# Altium PCB MultiRotor_v0.3.PcbDoc
Units mil, origin at the board's own origin, x right, y up, seen from the top; angles counter-clockwise.
Board outline 1840 x 1456 mil, 2 copper layers (Top Layer, Bottom Layer); 44 components, 42 nets, 161 pads, 24 vias.
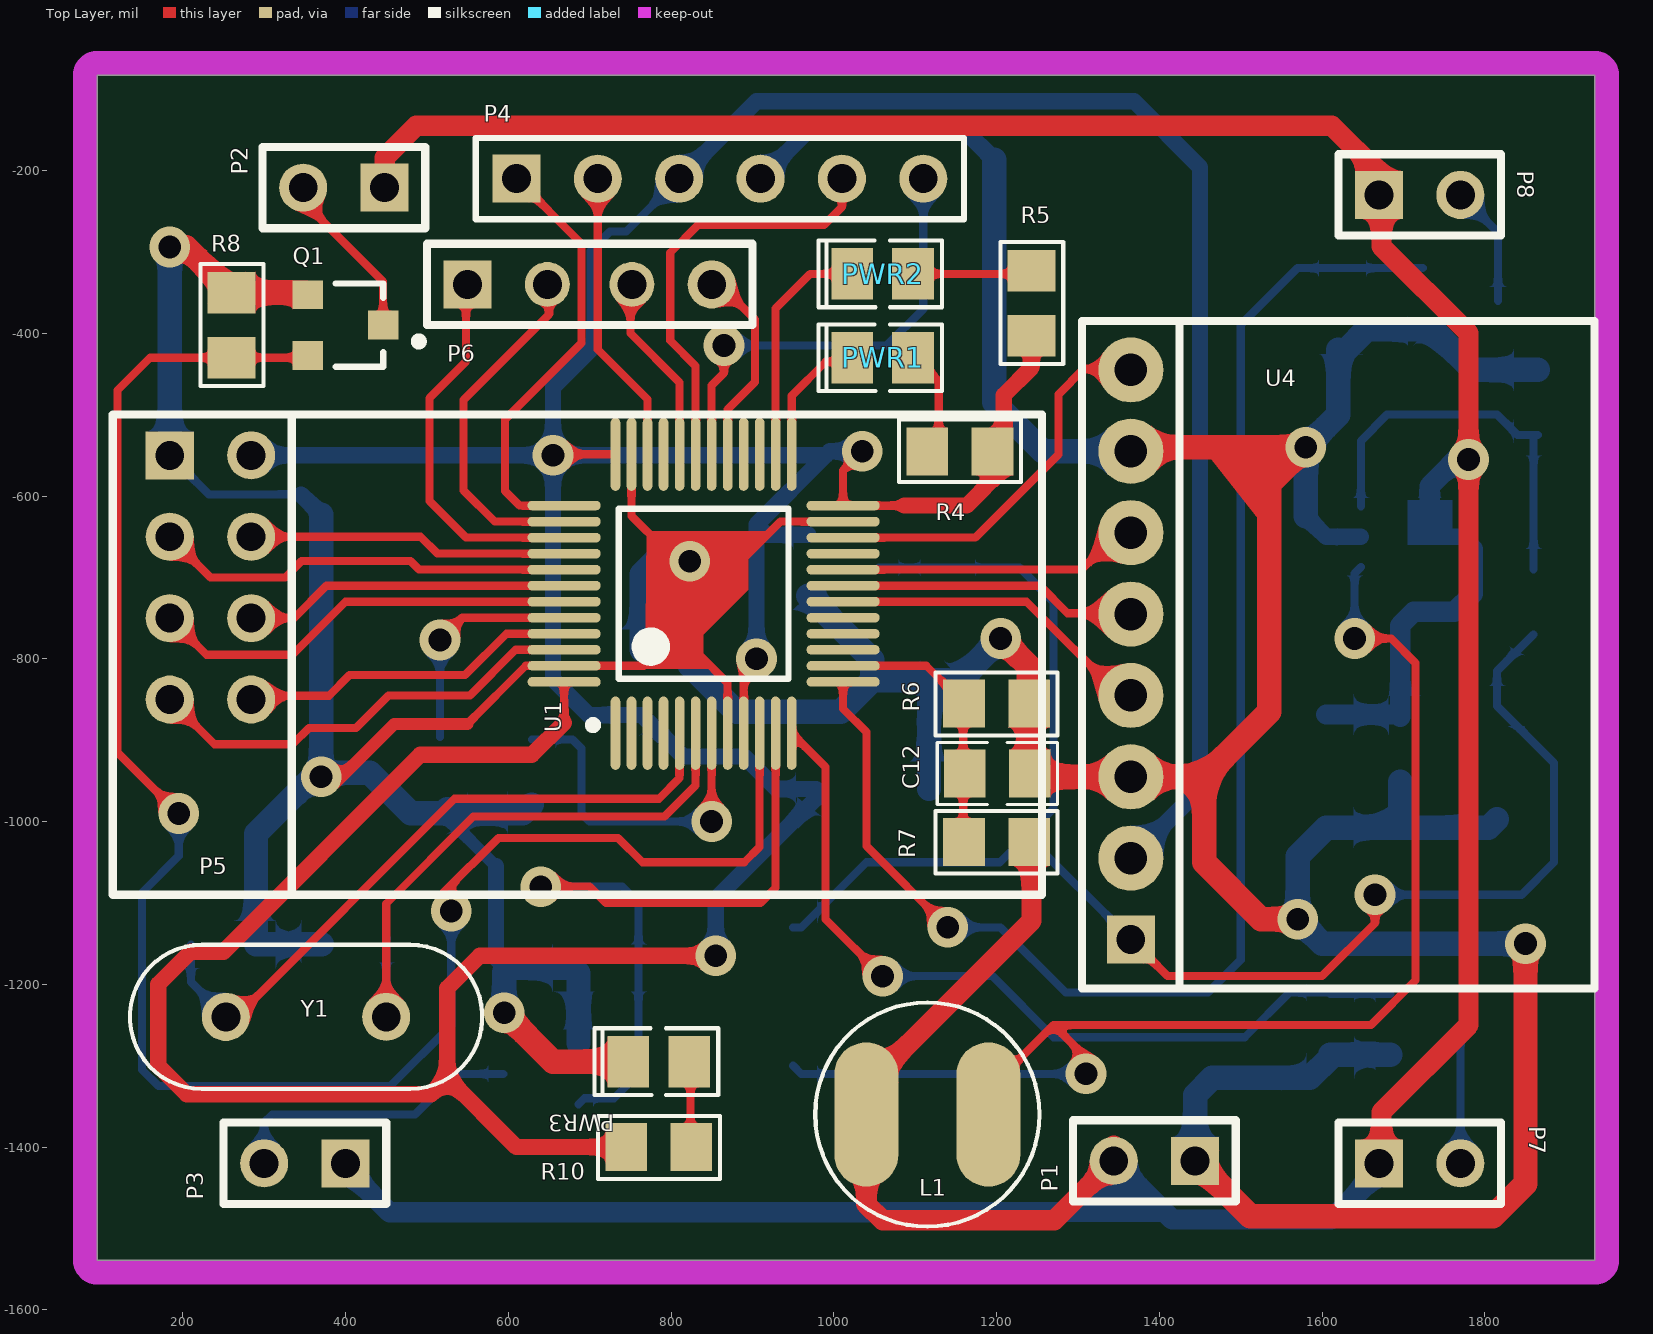
[diagram p0: Top Layer view]
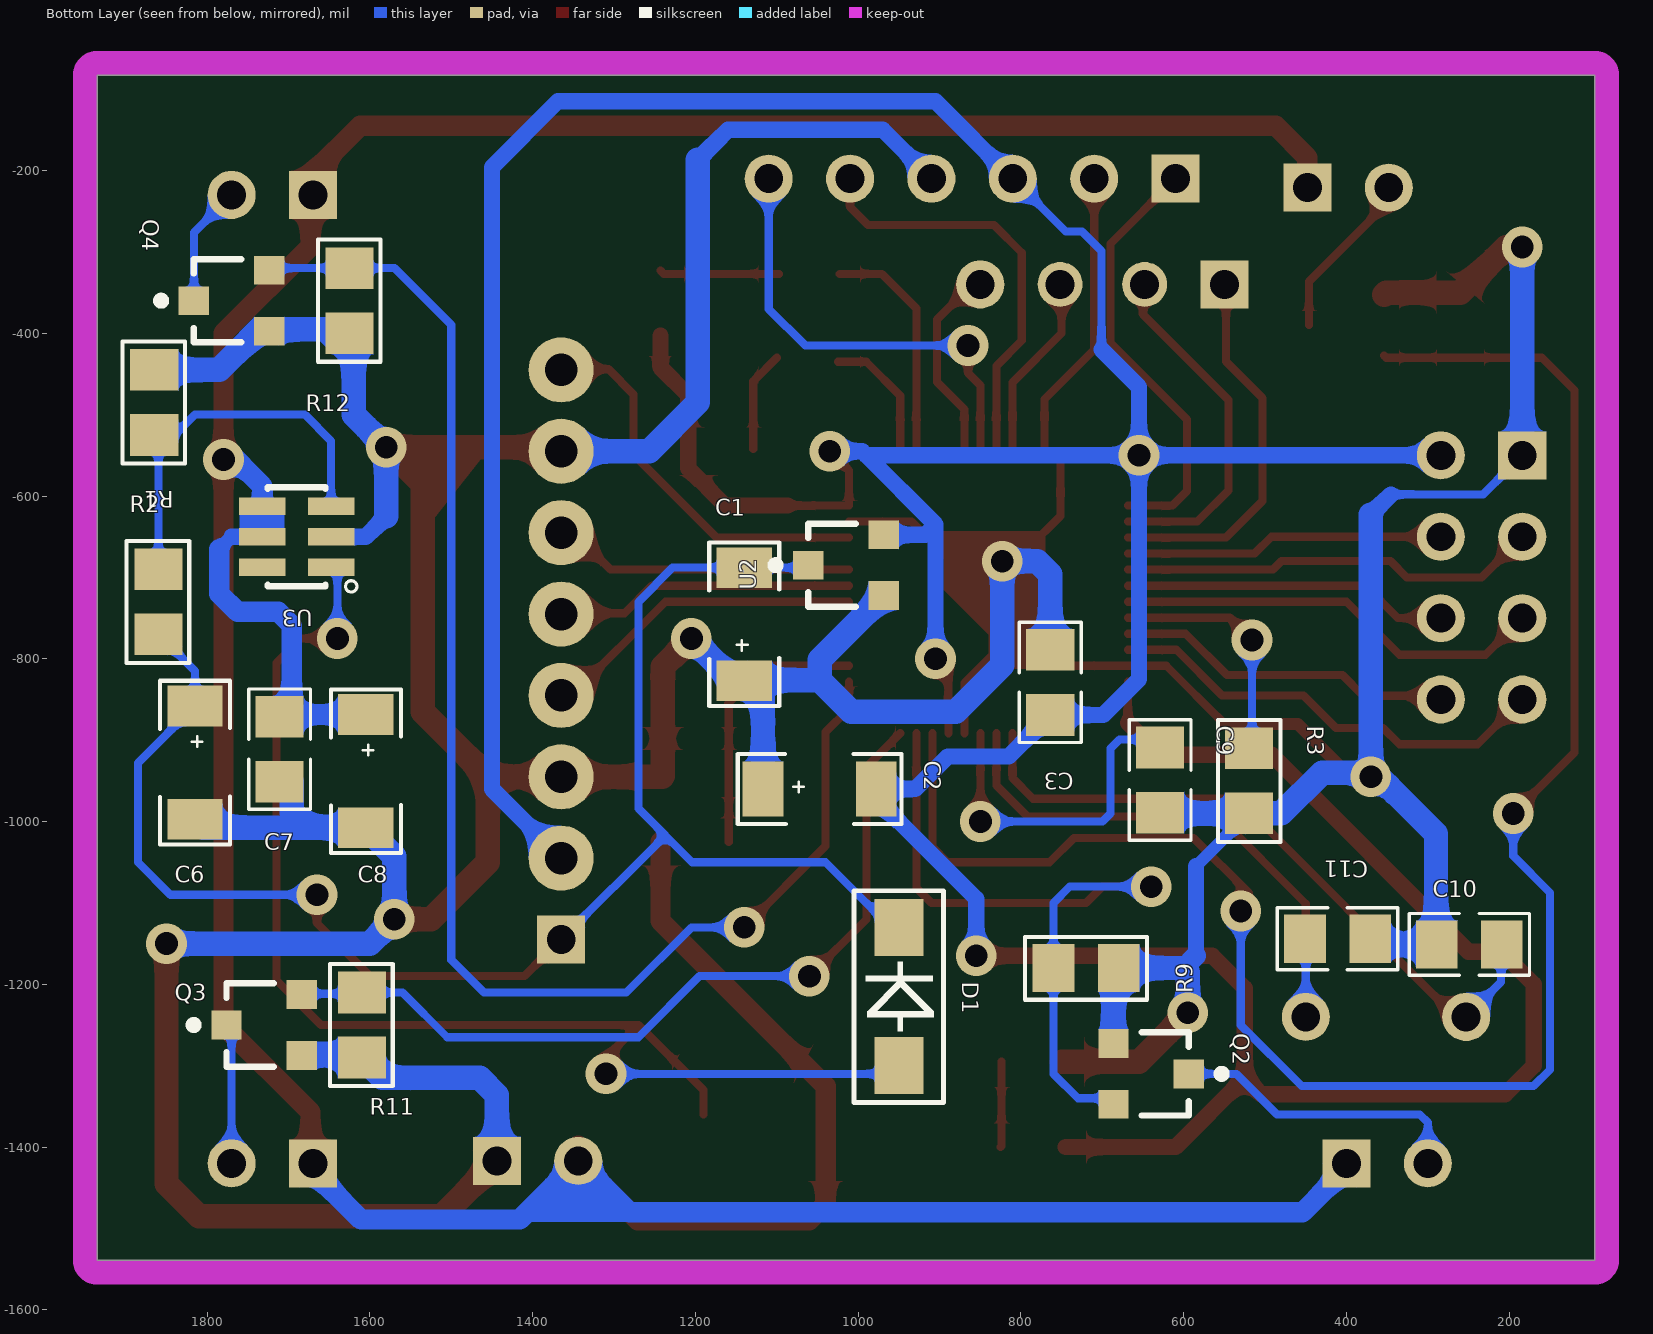
[diagram p1: Bottom Layer view, seen from below]

## Layer stack, top to bottom
Top Solder: solder mask 0.4, Solder Resist, Dk 3.5
Top Layer: signal copper 1.4
Dielectric1: dielectric 12.6, FR-4, Dk 4.8
Bottom Layer: signal copper 1.4
Bottom Solder: solder mask 0.4, Solder Resist, Dk 3.5

## Board outline
95,-83 1935,-83 1935,-1539 95,-1539

## Design rules (kind name [scope] priority, off if disabled: settings)
Clearance polygon [InPolygon] p1: gap=17
Clearance [All] p2: gap=7
PlaneClearance [All] p1: clearance=30
PolygonConnect [All] p1: connectstyle=Relief reliefconductorwidth=10 reliefentries=4 polygonreliefangle="90 Angle" airgapwidth=10
RoutingVias [All] p1: holewidth=28 width=50 viastyle="Through Hole" minholewidth=28 minwidth=50 maxholewidth=28 maxwidth=50
SilkToSolderMaskClearance SilkscreenOverComponentPads [IsPad] p1: minsilkscreentomaskgap=10 clearancetoexposedcopper=TRUE
SolderMaskExpansion [All] p1: expansion=4
Width [All] p1: maxlimit=40 minlimit=10 preferedwidth=10
28 further rules are at their usual default settings.

## Components (designator, comment, footprint, x,y, rotation, side; value= is the part's Value field where it differs from the comment)
C1 "Cap Pol1" CAP[1206] 1140,-760 r90 bottom
C2 "Cap Pol1" CAP[1206] 1050,-960 r180 bottom
C3 "Cap" CAP[0805] 765,-830 r270 bottom
C6 "Cap" CAP[1206] 1815,-925 r270 bottom
C7 "Cap" CAP[0805] 1710,-910 r90 bottom
C8 "Cap" CAP[1206] 1605,-935.5 r270 bottom
C9 "Cap" CAP[0805] 630,-950 r270 bottom
C10 "Cap" CAP[0805] 250,-1150 r0 bottom
C11 "Cap" CAP[0805] 410,-1145 r180 bottom
C12 "Cap" CAP[0805] 1200,-940 r180 top
D1 "1n5819" "DO-214AC - Diode" 950,-1300 r90 bottom
L1 "Inductor" Inductor_T10uH 1115,-1360 r0 top
P1 "Header 2" H2.54-1X2 1394,-1417 r180 top
P2 "Header 2" H2.54-1X2 398,-221 r180 top
P3 "Header 2" H2.54-1X2 350,-1420 r180 top
P4 "SIP+串口" HDR1X6 610,-210 r0 top
P5 "NRF2401" NRF(2401)模块 184,-550 r90 top
P6 "遥控接收PWM信号" H2.54-1X4 700,-340 r0 top
P7 "Header 2" H2.54-1X2 1720,-1420 r0 top
P8 "Header 2" H2.54-1X2 1720,-230 r0 top
PWR1 "LED2" LED[0805] 1060,-430 r0 top
PWR2 "LED2" LED[0805] 1060,-327 r0 top
PWR3 "LED2" LED[0805] 785,-1295 r0 top
Q1 "MOSFET-N" SOT23 400,-390 r270 top
Q2 "MOSFET-N" SOT23 640,-1310 r270 bottom
Q3 "MOSFET-N" SOT23 1730,-1250 r90 bottom
Q4 "MOSFET-N" SOT23 1770,-360 r90 bottom
R1 "Res1" RES[0805] 1860,-730 r90 bottom
R2 "Res1" RES[0805] 1865,-485 r90 bottom
R3 "Res1" RES[0805] 520,-950 r270 bottom
R4 "Res1" RES[0805] 1155,-545 r0 top
R5 "Res1" RES[0805] 1243,-363 r270 top
R6 "Res1" RES[0805] 1200,-855 r180 top
R7 "Res1" RES[0805] 1200,-1025 r180 top
R8 "Res1" RES[0805] 260,-390 r270 top
R9 "Res1" RES[0805] 720,-1180 r0 bottom
R10 "Res1" RES[0805] 785,-1400 r180 top
R11 "Res1" RES[0805] 1610,-1250 r90 bottom
R12 "Res1" RES[0805] 1625,-360 r90 bottom
U1 "STM32F103C8T6" LQFP-48 840,-720 r90 top
U2 "662K" SOT23 1015,-685 r90 bottom
U3 "CS3692" SOT23-6 1690,-650 r270 bottom
U4 "GY-88模块" MPU-6050 1365,-1145 r90 top
Y1 "XTAL" XTAL 350,-1240 r0 top

## Footprints (in the part's own frame and the unit in brackets; to place one, negate y for a bottom-side part, rotate by r counter-clockwise, add the part's x,y. Pads: shape width x height; smd on the part's side, far side on the other; paste and mask are expansions set on the pad)
CAP[0805] [mil]
  rect 51.18x59.06 smd: 1(-41,1) 2(39,1)
  silkscreen extent -75,-37 73,39
CAP[1206] [mil]
  rect 50x68 smd: 1(-67,0) 2(72,0)
  silkscreen extent -98,-43 103,43, body extent -63,-31 63,32, height 63
"DO-214AC - Diode" [mil]
  rect 70x60 smd: 1(0,0) 2(170,0)
  silkscreen extent -45,-55 215,55
H2.54-1X2 [mm]
  rect 1.5x1.5 hole 0.9: 1(-1.27,0)
  round 1.5 hole 0.9: 2(1.27,0)
  silkscreen extent -2.54,-1.27 2.54,1.27
H2.54-1X4 [mm]
  rect 1.5x1.5 hole 0.9: 1(-3.81,0)
  round 1.4 hole 0.9: 2(-1.321,0) 3(1.321,0)
  round 1.5 hole 0.9: 4(3.81,0)
  silkscreen extent -5.08,-1.27 5.08,1.27
HDR1X6 [mm] "Connector; Header; 6 Position"
  rect 1.5x1.5 hole 0.9: 1(0,0)
  round 1.5 hole 0.9: 2(2.54,0) 3(5.08,0) 4(7.62,0) 5(10.16,0) 6(12.7,0)
  silkscreen extent -1.27,-1.27 13.97,1.27
Inductor_T10uH [mm]
  oval 2x4.5 smd: 1(-1.905,0) 2(1.905,0)
  silkscreen extent -3.5,-3.5 3.5,3.5, body extent -3.51,-3.51 3.51,3.51, height 6.35
LED[0805] [mm]
  rect 1.3x1.6 smd: 1(0.95,0) 2(-0.95,0)
  silkscreen extent -2.01,-1.04 1.85,1.04
LQFP-48 [mm]
  oval 2.286x0.3 smd: 1(-4.354,2.75) 2(-4.354,2.25) 3(-4.354,1.75) 4(-4.354,1.25) 5(-4.354,0.75) 6(-4.354,0.25) 7(-4.354,-0.25) 8(-4.354,-0.75) 9(-4.354,-1.25) 10(-4.354,-1.75) 11(-4.354,-2.25) 12(-4.354,-2.75) 25(4.354,-2.75) 26(4.354,-2.25) 27(4.354,-1.75) 28(4.354,-1.25) 29(4.354,-0.75) 30(4.354,-0.25) 31(4.354,0.25) 32(4.354,0.75) 33(4.354,1.25) 34(4.354,1.75) 35(4.354,2.25) 36(4.354,2.75)
  oval 0.3x2.286 smd: 13(-2.75,-4.354) 14(-2.25,-4.354) 15(-1.75,-4.354) 16(-1.25,-4.354) 17(-0.75,-4.354) 18(-0.25,-4.354) 19(0.25,-4.354) 20(0.75,-4.354) 21(1.25,-4.354) 22(1.75,-4.354) 23(2.25,-4.354) 24(2.75,-4.354) 37(2.75,4.354) 38(2.25,4.354) 39(1.75,4.354) 40(1.25,4.354) 41(0.75,4.354) 42(0.25,4.354) 43(-0.25,4.354) 44(-0.75,4.354) 45(-1.25,4.354) 46(-1.75,4.354) 47(-2.25,4.354) 48(-2.75,4.354)
  silkscreen extent -4.22,-2.65 2.65,3.57, body extent -3.5,-3.5 3.5,3.5, height 1.6
MPU-6050 [mil]
  rect 59.06x59.06 hole 35.43: 1(0,0)
  round 80 hole 40: 2(100,0) 3(200,0) 4(300,0) 5(400,0) 6(500,0) 7(600,0) 8(700,0)
  silkscreen extent -60,-570 760,60, body extent -50,-50 750,50, height 336
NRF(2401)模块 [mm]
  rect 1.5x1.5 hole 0.9: 1(0,0)
  round 1.5 hole 0.9: 2(0,-2.54) 3(-2.54,0) 4(-2.54,-2.54) 5(-5.08,0) 6(-5.08,-2.54) 7(-7.62,0) 8(-7.62,-2.54)
  silkscreen extent -13.72,-27.22 1.27,1.78
RES[0805] [mm]
  rect 1.3x1.5 smd: 1(-1.016,0) 2(1.016,0)
  silkscreen extent -1.91,-0.97 1.91,0.99
SOT23 [mm] "SOT-23; 3 Leads; Body 3.1 x 2.5 mm, inc. leads (LxW max), Alternate Lead Configuration"
  rect 0.9x0.95 smd: 1(0,1.175) 2(0.95,-1.175) 3(-0.95,-1.175)
  silkscreen extent -1.3,-0.3 1.3,2.41
SOT23-6 [mm] "SOT-23/SC-74A; 5 Leads; Body 3.1 x 3 mm, inc. leads (LxW max)"
  rect 0.55x1.45 smd: 1(0.95,1.075) 2(0,1.075) 3(-0.95,1.075) 4(-0.95,-1.075) 5(0,-1.075) 6(0.95,-1.075)
  silkscreen extent -1.55,-0.9 1.73,1.88, body extent -1.4,-1.19 1.4,1.23, height 1.08
XTAL [mm]
  round 1.5 hole 0.9: 1(-2.465,-0.002) 2(2.54,0)
  silkscreen extent -5.46,-2.25 5.54,2.25

## Part data
C1 C2: library part Cap, "Capacitor"
C3 C7 C9 C10 C11 C12: "Capacitor"
C6 C8: library part "Cap Pol1", "Polarized Capacitor (Radial)"
D1: library part Diode_P6KE, "Diode_P6KE"
P1 P2 P3 P7 P8: "Header, 2-Pin"
P4: library part "Header 6", "Header, 6-Pin"
P5: library part "Header 4X2", "Header, 4-Pin, Dual row"
P6: library part "Header 4", "Header, 4-Pin"
PWR1 PWR2 PWR3: "Typical RED, GREEN, YELLOW, AMBER GaAs LED"
Q1 Q2 Q3 Q4: "N-Channel MOSFET"
R1 R2 R3 R4 R5 R6 R7 R8 R9 R10 R11 R12: "Resistor"
U1: "STM32 ARM-based 32-bit MCU with 64 Kbytes Flash, 48-pin LQFP, Industrial Temperature"
U2: library part AMS1117-3.3
U3: "Generic Phase Locked Loop"
U4: library part MPU-6050模块
Y1: "Crystal Oscillator"

## Via types
v1: diameter 50, hole 28, Top Layer to Bottom Layer, 24 vias

## Nets (pads, with @x,y where several pads share a name; then routed paths per layer and width w, separated by ;. In a path a pad name is that pad's centre, name@x,y a point inside that pad or via, vN(x,y) a via of type N, cw(c..) or ccw(c..) an arc to the next point about the centre after c; other vN are vias at no path point)
BAT_CHECK: C12.2 R6.2 R7.2 U1.14 | length 338.8
  Top Layer w10: U1.14 1113.58,-808.58 R6.2 ; R7.2@1159,-1025 R6.2@1159,-854
CE: P5.3 U1.41 | length 517.9
  Top Layer w10: P5.3 234,-700 325.97,-700 345.97,-680 480,-680 490.47,-690.47 U1.41
CSN: P5.4 U1.40 | length 393.2
  Top Layer w10: P5.4 492,-650 512.79,-670.79 U1.40
G_INT: U1.22 U4.8 | length 468.7
  Top Layer w10: U1.22 1173.9,-651.1 1276,-549 1276,-475 1307,-444 U4.8@1351,-444
GND: C1.1 C2.1 C3.1 C6.2 C7.1 C8.2 C9.2 C10.2 C11.2 C12.1 P1.1 P4.4 P5.1 PWR3.2 Q1.3 Q2.3 Q3.3 Q4.3 R2.2 R3.2 R6.1 R8.1 R9.1 R11.1 R12.1 U1.8 U1.23 U1.35 U1.47 U2.3 U3.2 U4.3 U4.7 | length 8742
  Top Layer w10: 550,-880 621.42,-808.58 U1.47 766.42,-808.58 835,-740 835,-795 869.53,-829.53 U1.8 ; U1.35 751.42,-624.42 791,-664 ; 892,-674 934.58,-631.42 U1.23
  Top Layer w15: v1(370,-945) 395,-945 460,-880 550,-880
  Top Layer w30: v1(184,-294) 204,-294 R8.1 351.14,-350 Q1.3 ; v1(595,-1235) 655,-1295 PWR3.2@750,-1295 ; 823,-707 v1(823,-680) ; v1(1205,-775) 1240,-810 R6.1 1240,-944 1241,-945 U4.3 1455,-945 ; U4.7 1370,-540 v1(1580,-540) 1535,-585 1535,-865 1455,-945 ; P1.1 1512,-1485 1810,-1485 1850,-1445 v1(1850,-1150) ; v1(1570,-1120) 1525,-1120 1455,-1050 1455,-945
  Bottom Layer w10: P5.1 232,-598 345.33,-598
  Bottom Layer w15: R3.2 585,-1055
  Bottom Layer w20: 345.33,-598 370,-622.67 ; 585,-1165 585,-1055 ; P4.4 970,-150 1160,-150 1197,-187 ; 1580,-625 1605,-650 U3.2
  Bottom Layer w25: 585,-1165 600,-1180
  Bottom Layer w30: P5.1 v1(184,-294) ; v1(370,-945) v1@370,-940 ; 370,-622.67 v1@370,-940 ; C11.2@371,-1151 290,-1151 290,-1015 365,-940 v1@370,-940 ; R3.2 480,-990 430,-940 v1@370,-940 ; R3.2@525,-985 530,-990 618,-990 C9.2@629,-979 ; v1(595,-1235) 595,-1185 600,-1180 R9.1 686.26,-1186.26 Q2.3 ; C3.1 764,-696 780,-680 v1(823,-680) 823,-808 880,-865 1008.66,-865 1047.4,-826.26 ; U2.3 1047.4,-801.06 1047.4,-826.26 ; C2.1 1117,-848.52 1139.26,-826.26 1047.4,-826.26 ; C1.1 1153,-827 v1(1205,-775) ; 1197,-187 1197,-485 1257,-545 U4.7 ; P1.1 1444,-1336 1465,-1315 1585,-1315 R11.1 ; 1580,-625 v1(1580,-540) 1620,-500 R12.1@1620,-420 ; R11.1@1610,-1286.4 Q3.3@1683.74,-1286.4 ; R12.1@1630,-420 1655,-395 1721.34,-395 Q4.3 1737.4,-397.4 1785,-445 R2.2 ; C7.1@1696,-951 1696,-989 1677.5,-1007.5 ; C6.2 1804.5,-1007.5 1677.5,-1007.5 ; v1(1850,-1150) 1600,-1150 v1(1570,-1120) 1570,-1042.5 C8.2 1677.5,-1007.5
LED1: PWR1.2 U1.25 | length 165.8
  Top Layer w10: U1.25 948.27,-476.83 990.1,-435 PWR1.2@1025,-435
LED2: PWR2.2 U1.26 | length 290.8
  Top Layer w10: U1.26 928.58,-369.42 971,-327 PWR2.2
M_DRDY: U1.20 U4.6 | length 358.8
  Top Layer w10: U1.20 1304.53,-690.47 U4.6@1351,-644
MISO: P5.7 U1.46 | length 555.5
  Top Layer w10: P5.7 239,-905 335,-905 355,-885 413,-885 453,-845 553,-845 609.1,-788.9 U1.46
MOSI: P5.6 U1.42 | length 401.1
  Top Layer w10: P5.6 337,-750 376.84,-710.16 U1.42
NetC9_1: C9.1 U1.7 | length 418.1
  Top Layer w10: v1(849.84,-1000) U1.7
  Bottom Layer w10: C9.1@629,-899 679,-899 690,-910 690,-990 700,-1000 v1(849.84,-1000)
NetC10_1: C10.1 U1.5 Y1.1 | length 841.1
  Top Layer w10: Y1.1 265.91,-1240.09 534,-972 785,-972 810.47,-946.53 U1.5
  Bottom Layer w10: C10.1@210,-1151 210,-1197.13 Y1.1
NetC11_1: C11.1 U1.6 Y1.2 | length 740.1
  Top Layer w10: Y1.2 450,-1101 557,-994 792,-994 830.16,-955.84 U1.6
  Bottom Layer w10: Y1.2 450,-1145 C11.1
NetD1_1: D1.1 L1.2 U3.1 | length 1619.8
  Top Layer w10: L1.2 1190,-1330 1270,-1250 ; v1(1310,-1310) 1310,-1290 1270,-1250 ; v1(1640,-775) 1685,-775 1715,-805 1715,-1195 1660,-1250 1270,-1250
  Bottom Layer w10: D1.1 960,-1310 v1(1310,-1310) ; v1(1640,-775) 1640,-695.08 U3.1
NetP2_2: P2.2 Q1.1 | length 226.7
  Top Layer w10: P2.2 348,-238 446.26,-336.26 Q1.1
  Bottom Layer w10: P2.2@348,-238 P2.2
NetP3_2: P3.2 Q2.1 | length 368.6
  Bottom Layer w10: P3.2 300,-1370 310,-1360 485.3,-1360 535.3,-1310 Q2.1
NetP7_2: P7.2 Q3.1 | length 172.6
  Bottom Layer w10: P7.2 1770,-1256.26 Q3.1
NetP8_2: P8.2 Q4.1 | length 149.2
  Bottom Layer w10: P8.2 1816.26,-276.26 Q4.1
NetPWR1_1: PWR1.1 R4.1 | length 124
  Top Layer w10: PWR1.1@1100,-430 1128.9,-458.9 1128.9,-541.9 R4.1@1129,-542
NetPWR2_1: PWR2.1 R5.1 | length 147.3
  Top Layer w10: PWR2.1 1239,-327 R5.1
NetPWR3_1: PWR3.1 R10.1 | length 105.5
  Top Layer w10: PWR3.1@823.9,-1295 823.9,-1398.9 R10.1
NetR1_2: R1.2 R2.1 U3.3 | length 486.3
  Bottom Layer w10: U3.3 1647.68,-532.32 1680,-500 1815,-500 1840,-525 R2.1 ; R1.2 R2.1@1860,-525
NetR3_1: R3.1 U1.44 | length 283
  Top Layer w10: v1(516,-777) 543.47,-749.53 U1.44
  Bottom Layer w10: R3.1@516,-896 v1(516,-777)
NRF_IRQ: P5.8 U1.45 | length 416.1
  Top Layer w10: P5.8@284,-845.41 379.59,-845.41 405,-820 547,-820 597.79,-769.21 U1.45
PWMA: Q1.2 R8.2 U1.10 | length 2298.6
  Top Layer w10: v1(195,-990) 120,-915 120,-470 160,-430 351.14,-430 Q1.2 ; v1(530,-1110) 530,-1098 520,-1088 588,-1020 735,-1020 765,-1050 890,-1050 908.9,-1031.1 U1.10
  Bottom Layer w10: v1(195,-990) 195,-1042.5 150,-1087.5 150,-1305 170,-1325 455,-1325 530,-1250 v1(530,-1110)
PWMB: Q2.2 R9.2 U1.11 | length 922.1
  Top Layer w10: v1(640,-1080) 700,-1080 720,-1100 910,-1100 928.58,-1081.42 U1.11
  Bottom Layer w10: v1(640,-1080) 740,-1080 760,-1100 R9.2 760,-1310 730,-1340 693.66,-1340 Q2.2
PWMC: Q3.2 R11.2 U1.12 | length 1022.5
  Top Layer w10: U1.12 990,-933.15 990,-1120 v1(1060,-1190)
  Bottom Layer w10: v1(1060,-1190) 1195,-1190 1270,-1265 1505,-1265 1560,-1210 R11.2 ; R11.2@1610,-1211.6 Q3.2@1683.74,-1211.6
PWMD: Q4.2 R12.2 U1.13 | length 1797.4
  Top Layer w10: U1.13 1011.42,-861.42 1040,-890 1040,-1030 v1(1140,-1130)
  Bottom Layer w10: v1(1140,-1130) 1205,-1130 1285,-1210 1460,-1210 1500,-1170 1500,-390 1570,-320 Q4.2@1723.74,-320
SCK: P5.5 U1.43 | length 530.2
  Top Layer w10: P5.5 229,-795 335,-795 400.16,-729.84 U1.43
SCL: U1.18 U4.4 | length 386.9
  Top Layer w10: U1.18 1236.84,-729.84 U4.4@1351,-844
SDA: U1.19 U4.5 | length 353.6
  Top Layer w10: U1.19 1253.16,-710.16 1287,-744 U4.5@1351,-744
SWCLK: P4.1 U1.37 | length 536
  Top Layer w10: P4.1 690,-290 690,-412 596,-506 596,-594 613.73,-611.73 U1.37
SWDIO: P4.2 U1.34 | length 363.9
  Top Layer w10: P4.2 710,-420 771.1,-481.1 U1.34
TIM1_1_D: P6.4 U1.29 | length 246.1
  Top Layer w10: P6.4@850,-350 870,-350 903,-383 903,-460 869.53,-493.47 U1.29
TIM1_4_C: P6.3 U1.32 | length 233.6
  Top Layer w10: P6.3@750,-340 750,-400 810.47,-460.47 U1.32
TIM2_1_B: P6.2 U1.38 | length 436
  Top Layer w10: P6.2@650,-340 650,-377 545,-482 545,-593 583.42,-631.42 U1.38
TIM2_2_A: P6.1 U1.39 | length 468.9
  Top Layer w10: P6.1@548,-340 548,-434.75 503,-479.75 503,-606 548.1,-651.1 U1.39
USART1_RX: P4.5 U1.31 | length 529.7
  Top Layer w10: U1.31 830.16,-440.16 799,-409 799,-301 833,-267 988,-267 1010,-245 P4.5
USART1_TX: P4.6 U1.30 | length 563.5
  Top Layer w10: U1.30 849.84,-464.16 865,-449 v1(865,-415)
  Bottom Layer w10: v1(865,-415) 1065,-415 1110,-370 P4.6
VCC3.3: C2.2 C3.2 P4.3 P5.2 R4.2 R5.2 R10.2 U1.9 U1.24 U1.36 U1.48 U2.2 U4.2 | length 6540.2
  Top Layer w10: v1@655,-548.58 725,-548.58 ; 668.58,-878.42 U1.48 ; U1.9 889.21,-815.79 v1(905,-800) ; v1(1035,-545) 1011.42,-568.58 U1.24 1086.73,-611.73
  Top Layer w20: 668.58,-878.42 629,-918 492,-918 250,-1160 210,-1160 170,-1200 170,-1300 205,-1335 505,-1335 525,-1315 ; R10.2 610,-1400 525,-1315 ; v1(855,-1165) 565,-1165 525,-1205 525,-1315 ; 1086.73,-611.73 1163.27,-611.73 1209,-566 1209,-476 1243,-442 R5.2
  Bottom Layer w10: 701,-420 701,-299 725,-275 745,-275 P4.3
  Bottom Layer w20: P5.2 v1(655,-550) ; 701,-420 655,-466 v1(655,-550) ; P4.3 905,-115 1369,-115 1450,-196 1450,-960 U4.2 ; v1(855,-1165) 855,-1095 978,-972 C2.2 930,-960 890,-920 815,-920 C3.2 699,-869 655,-825 v1(655,-550) ; v1(905,-800) v1@906.34,-798.66 ; v1@905,-798.66 905,-635 ; U2.2 917.6,-647.6 905,-635 ; v1(1035,-545) 995,-545 990,-550 ; v1(655,-550) 990,-550 ; 905,-635 990,-550
VCC3.7: C7.2 C8.1 L1.1 P1.2 P2.1 P3.1 P7.1 P8.1 R7.1 U3.4 U3.5 | length 5345.4
  Top Layer w25: P2.1 448,-184 487,-145 1612,-145 P8.1@1670,-203 ; R7.1@1243,-1025 1243,-1122 1040,-1325 L1.1 1040,-1470 1060,-1490 1271,-1490 P1.2 P1.2@1344,-1398 ; P7.1@1673,-1415 1673,-1357 1780,-1250 1780,-400 1673,-293 P8.1@1673,-249
  Bottom Layer w15: 1770,-650 1785,-665
  Bottom Layer w20: U3.5 1770,-650
  Bottom Layer w25: P3.1@397,-1423 454,-1480 1281,-1480 P1.2 1416,-1489 1611,-1489 1673,-1427 P7.1@1673,-1415 ; C8.1 1693.5,-868.5 C7.2@1695,-870 ; C7.2@1696,-871 1696,-759 1712.75,-742.25 1762.75,-742.25 1785,-720 1785,-665 ; U3.4 1732.32,-587.68 1765,-555 v1(1780,-555)
VCC5: C1.2 C6.1 D1.2 R1.1 U2.1 U4.1 | length 1991.9
  Top Layer w10: U4.1 1410,-1190 1600,-1190 1665,-1125 v1(1665,-1090)
  Bottom Layer w10: D1.2 960,-1130 1040,-1050 1204,-1050 1270,-984 1270,-730 1228,-688 C1.2 U2.1@1055.74,-688 ; 1237,-1017 U4.1 ; v1(1665,-1090) 1845,-1090 1885,-1050 1885,-928 C6.1 1815,-815 R1.1
pads on no net: U1.1 U1.2 U1.3 U1.4 U1.15 U1.16 U1.17 U1.21 U1.27 U1.28 U1.33 U3.6

## Keep-outs
Keep-Out Layer:
  lines w30: 80,-1539 ccw(c95,-1539) 95,-1554 ; 80,-1539 ccw(c95,-1539) 95,-1554 ; 80,-1539 80,-83 ; 80,-83 cw(c95,-83) 95,-68 ; 80,-83 cw(c95,-83) 95,-68 ; 95,-1554 1935,-1554 ; 95,-68 1935,-68 ; 1935,-1554 ccw(c1935,-1539) 1950,-1539 ; 1935,-1554 ccw(c1935,-1539) 1950,-1539 ; 1935,-68 cw(c1935,-83) 1950,-83 ; 1935,-68 cw(c1935,-83) 1950,-83 ; 1950,-1539 1950,-83

## Other copper
Top Layer:
  region net GND: 769,-761 769,-806 766.42,-808.58 770.1,-812.26 852.26,-812.26 835,-795 835,-760
  region net GND: 770,-643 919,-643 921,-645 895,-671 895,-715 840,-770 831,-761 769,-761
  region net GND: 1580,-540 1550,-580 1535,-645 1460,-550 1460,-535
Bottom Layer:
  region net VCC3.7: 1705,-605 1760,-605 1760,-660 1705,-660
  region net VCC3.7: 1273,-1492 1345,-1492 1423,-1492 1345,-1414 1342,-1414

## Dimensions
95,-83 to 95,-1540 on Bottom Solder
95,-83 to 1935,-83 on Bottom Solder